# Allegro board board6DFfils7Fini.brd
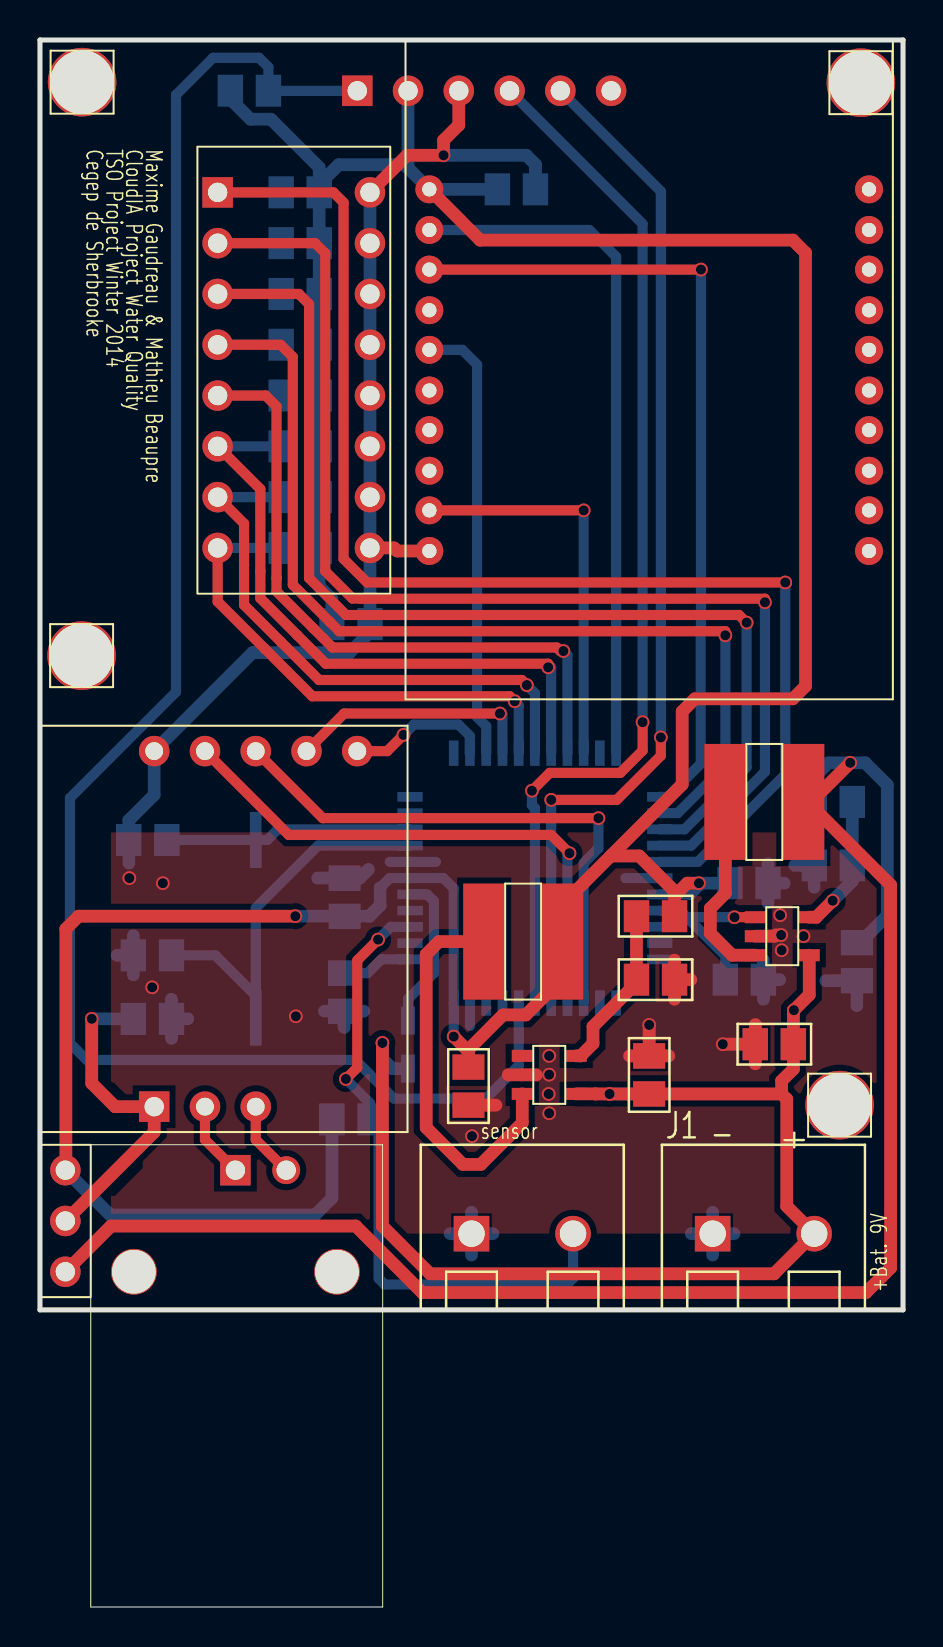
[diagram p0: board, top side]
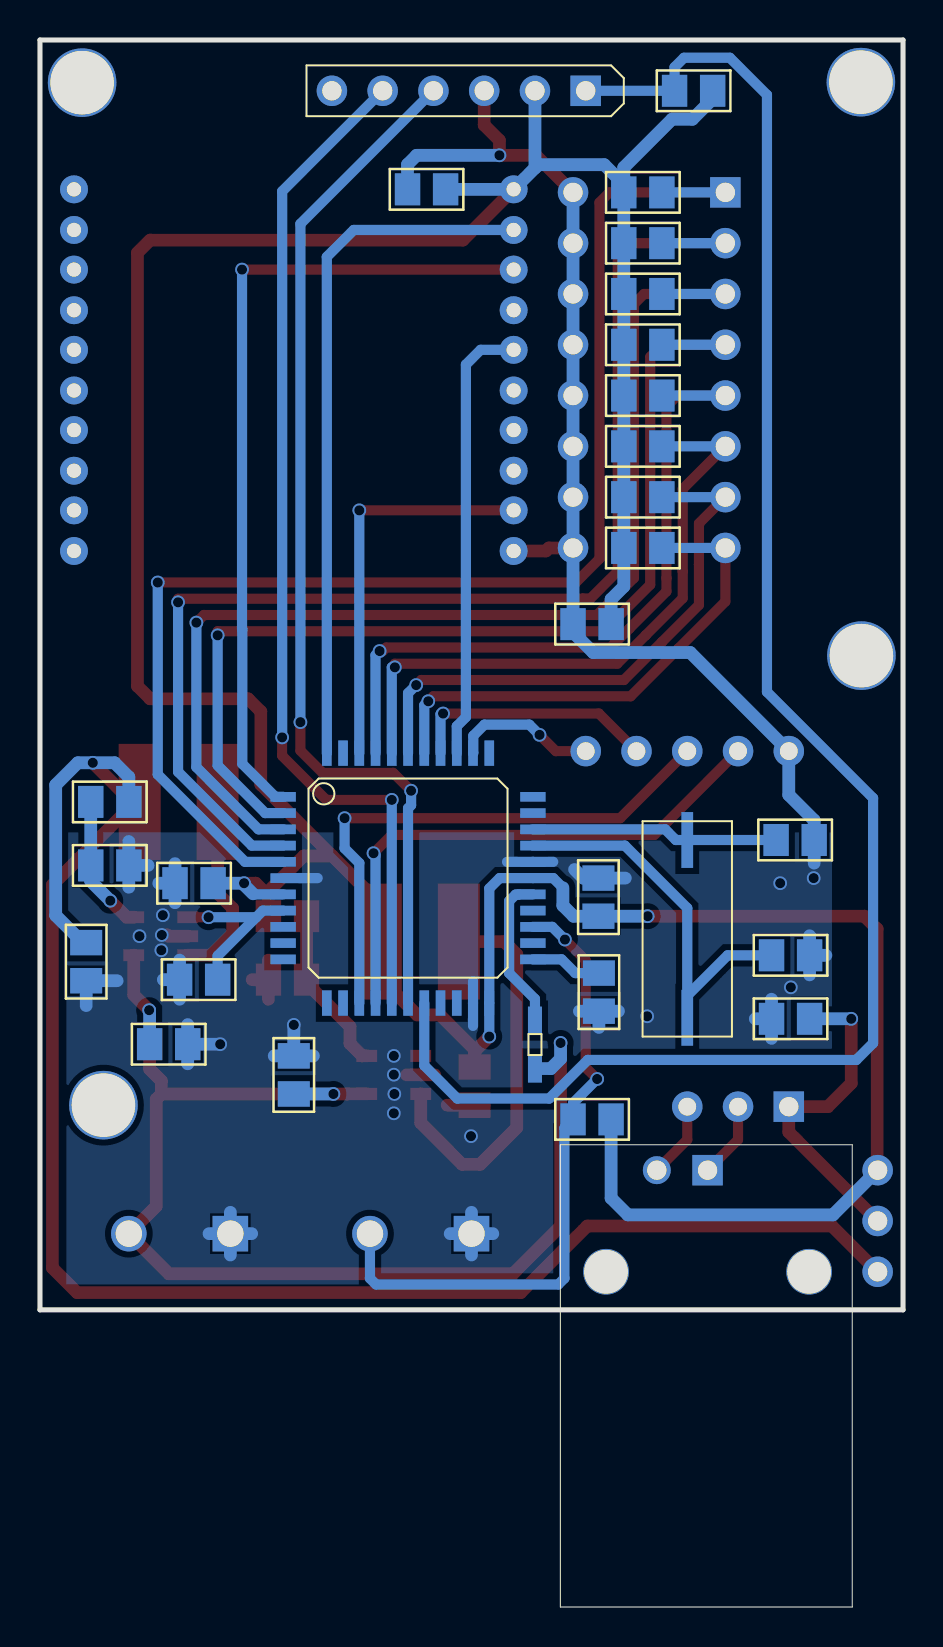
[diagram p1: board, bottom side, seen from below]

Outline 43.18 x 78.36 mm; copper layers: TOP, BOTTOM. Coordinates in mm from the lower left corner of the outline.
Outline path: 0,78.36 0,14.86 43.18,14.86 43.18,78.36 0,78.36

## Design rules (mm)
nets with their own width: min track width 0.508; nets CAPTEURRX CAPTEURTX CELL7 CELL8 ENABLE POWER5V N45185 N45221 N45265 N45305 N56544 N56546 N56548 N56550 N56552 N56554 N56556 N56558 N61373 N61405 N78069 N78169 N81598 N94966 XBEEDIN XBEEDOUT XBEERESET XBEESLEEP
nets with their own width: min track width 0.635; nets 3.3V 5V 6A9V(PILE) GND N61433 N82912 N83047 N88127 N88155

## Placement (name value [footprint] x y rotation side)
3.3V  Vz 6V  [DIODESOD323]  18.41 26.92 90 bottom
+BAT. 9V  HEADER 2  [CONNECTEUR_2_200]  33.65 18.67 0 top
C1  10uF  [C_0805]  35.79 28.14 0 bottom
C2  100nF  [C_0805]  35.79 28.14 0 top
C3  10uF  [C_0805]  40.87 31.32 90 bottom
C4  10uF  [C_0805]  30.48 27.56 270 top
C5  100nF  [C_0805]  30.48 27.56 270 bottom
C6  22uF  [C_0805]  21.44 25.1 90 top
C7  10uF  [C_0805]  14.61 49.15 0 bottom
C8  100uF  [C_0805]  22.89 70.89 0 bottom
C9  27pF  [C_0805]  4.67 32.59 0 bottom
C10  27pF  [C_0805]  4.44 38.35 0 bottom
C11  10uF  [C_0805]  15.21 31.7 270 bottom
C12  0.1 uF  [C_0805]  15.24 34.54 90 bottom
C13  0.1 uF  [C_0805]  34.52 36.2 0 bottom
C14  10uF  [C_0805]  4.67 29.41 0 bottom
J2  HEADER 3  [JUMPER3]  1.27 16.76 90 top
J3  Convertion Board  [CONDUCTIVITY_SENSOR]  0 23.75 90 top
J4  BNC au capteur  [CONNECTEUR_BNC]  2.54 23.11 270 top
J6  Connecteur PicKit  [SIP6]  15.88 75.82 270 bottom
J7  contact eau  [CONNECTEUR_2_200]  21.59 18.67 0 top
L1  10uH  [BOBINE10U100MH]  34.29 40.26 0 top
L2  10uH  [BOBINE10U100MH]  22.23 33.27 0 top
NOREF  -  [unnamed]  40 25.1 270 top
NOREF#2  -  [unnamed]  2.11 76.25 270 top
NOREF#3  -  [unnamed]  41.07 76.23 270 top
NOREF#4  -  [unnamed]  2.08 47.57 270 top
R1  105K  [R_0805]  40.64 40.26 180 bottom
R2  ?  [R_0805]  36.2 31.37 180 bottom
R3  20K  [R_0805]  38.73 37.08 0 bottom
R4  61.9K  [R_0805]  29.84 34.54 0 top
R5  20K  [R_0805]  31.75 31.37 180 top
R6  4.7K  [R_0805]  9.53 75.82 0 bottom
R7  10K  [R_0805]  16.51 24.38 180 bottom
R8  10K  [R_0805]  12.07 70.74 0 bottom
R9  10K  [R_0805]  12.07 68.2 0 bottom
R10  10K  [R_0805]  12.07 65.66 0 bottom
R11  10K  [R_0805]  12.07 63.12 0 bottom
R12  10K  [R_0805]  12.07 60.58 0 bottom
R13  10K  [R_0805]  12.07 58.04 0 bottom
R14  10K  [R_0805]  12.07 55.5 0 bottom
R15  10K  [R_0805]  12.07 52.96 0 bottom
SW1  SW DIP-8  [DIPSWITCH]  8.89 70.74 0 top
U1  LM104/TO  [TPS560200]  35.79 34.49 0 top
U2  LM104/TO  [TPS560200]  24.13 27.56 0 top
U3  PIC18F47J13  [PQFP44]  24.77 36.45 180 bottom
U4  Xbee  [XBEE]  30.48 61.85 0 top
Y1  4Mhz CRYSTAL  [CRYSTAL_SMD]  10.79 33.91 270 bottom

## Library data of the parts
3.3V = DIODE ZENER
+BAT. 9V = HEADER 2_1
C1-C6 C14 = C
C7-C11 = CAPACITOR NON-POL
C12 C13 = CAP NP
J2 = HEADER 3
J3 = HEADER 3X2_3
J4 = BNC
J6 = HEADER 6_0
J7 = HEADER 2
L1 L2 = INDUCTOR
R1-R5 R7-R15 = R
R6 = RESISTOR
SW1 = SW DIP-8: User Part Number: ***
U1 U2 = LM104/TO_3
U3 = PIC16C67_2
U4 = HEADER 11X2_1
Y1 = CRYSTAL

## Footprints (pads in the part's own frame, mm; a bottom-side part is the same pattern mirrored in y, then rotated)
BOBINE10U100MH
  rect 2.1x5.8 smd: 1(0,0) 2(3.9,0)
C_0805
  rect 1.27x1.6 smd: 1(0,0) 2(1.905,0)
CONDUCTIVITY_SENSOR
  rect 1.524x1.524 hole 0.965: 1(1.27,-5.715)
  round 1.524 hole 0.889: 2(1.27,-8.255) 3(1.27,-10.795) 4(19.05,-5.715) 5(19.05,-8.255) 6(19.05,-10.795) 7(19.05,-13.335) 8(19.05,-15.875)
CONNECTEUR_2_200
  rect 1.778x1.778 hole 1.321: 1(0,0)
  round 1.778 hole 1.321: 2(5.08,0)
CONNECTEUR_BNC
  round 2.286 hole 2.184: (6.35,12.319) (6.35,2.159)
  rect 1.524x1.524 hole 0.965: 1(1.27,7.239)
  round 1.397 hole 0.965: 2(1.27,9.779)
CRYSTAL_SMD
  rect 2.794x0.584 smd: 1(-4.445,0) 2(4.445,0)
DIODESOD323
  rect 1.4x0.7 smd: 1(0,0) 2(2.4,0)
DIPSWITCH
  rect 1.524x1.524 hole 0.965: 1(0,0)
  round 1.524 hole 0.965: 2(0,-2.54) 3(0,-5.08) 4(0,-7.62) 5(0,-10.16) 6(0,-12.7) 7(0,-15.24) 8(0,-17.78) 9(7.62,-17.78) 10(7.62,-15.24) 11(7.62,-12.7) 12(7.62,-10.16) 13(7.62,-7.62) 14(7.62,-5.08) 15(7.62,-2.54) 16(7.62,0)
JUMPER3
  round 1.524 hole 0.965: 1(0,0) 2(2.54,0) 3(5.08,0)
PQFP44
  rect 1.27x0.483 smd: 1(-6.248,4.064) 2(-6.248,3.251) 3(-6.248,2.438) 4(-6.248,1.626) 5(-6.248,0.813) 6(-6.248,0) 7(-6.248,-0.813) 8(-6.248,-1.626) 9(-6.248,-2.438) 10(-6.248,-3.251) 11(-6.248,-4.064) 23(6.248,-4.064) 24(6.248,-3.251) 25(6.248,-2.438) 26(6.248,-1.626) 27(6.248,-0.813) 28(6.248,0) 29(6.248,0.813) 30(6.248,1.626) 31(6.248,2.438) 32(6.248,3.251) 33(6.248,4.064)
  rect 0.483x1.27 smd: 12(-4.064,-6.248) 13(-3.251,-6.248) 14(-2.438,-6.248) 15(-1.626,-6.248) 16(-0.813,-6.248) 17(0,-6.248) 18(0.813,-6.248) 19(1.626,-6.248) 20(2.438,-6.248) 21(3.251,-6.248) 22(4.064,-6.248) 34(4.064,6.248) 35(3.251,6.248) 36(2.438,6.248) 37(1.626,6.248) 38(0.813,6.248) 39(0,6.248) 40(-0.813,6.248) 41(-1.626,6.248) 42(-2.438,6.248) 43(-3.251,6.248) 44(-4.064,6.248)
R_0805
  rect 1.27x1.6 smd: 1(0,0) 2(1.905,0)
SIP6
  rect 1.524x1.524 hole 0.965: 1(0,0)
  round 1.524 hole 0.965: 2(0,-2.54) 3(0,-5.08) 4(0,-7.62) 5(0,-10.16) 6(0,-12.7)
TPS560200
  rect 1.05x0.6 smd: 1(0,0) 2(0,-0.95) 3(0,-1.9) 4(2.7,-1.9) 5(2.7,0)
unnamed
  round 3.429 hole 3.175: 1(0,0)
XBEE
  round 1.397 hole 0.711: 1(-10.998,9.042) 2(-10.998,7.01) 3(-10.998,5.029) 4(-10.998,2.997) 5(-10.998,1.016) 6(-10.998,-1.016) 7(-10.998,-2.997) 8(-10.998,-5.029) 9(-10.998,-7.01) 10(-10.998,-9.042) 11(10.998,-9.042) 12(10.998,-7.01) 13(10.998,-5.029) 14(10.998,-2.997) 15(10.998,-1.016) 16(10.998,1.016) 17(10.998,2.997) 18(10.998,5.029) 19(10.998,7.01) 20(10.998,9.042)

## Nets
3.3V: C6.2 C7.1 C8.1 C12.1 C13.1 J2.3 J6.2 L2.2 R4.2 R6.1 R7.2 R8.2 R9.2 R10.2 R11.2 R12.2 R13.2 R14.2 R15.2 U3.7(VDD1) U3.22(RA3) U3.28(VDD2) U4.1
5V: C3.2 J2.1 L1.2 R1.2
GND: +BAT. 9V.1 C1.1 C2.1 C3.1 C4.1 C5.1 C6.1 C7.2 C8.2 C9.1 C10.1 C11.2 C12.2 C13.2 C14.2 J3.4(GND) J6.3 J7.1 R2.1 R3.1 R5.1 SW1.9(B8) SW1.10(B7) SW1.11(B6) SW1.12(B5) SW1.13(B4) SW1.14(B3) SW1.15(B2) SW1.16(B1) U1.2(GND) U2.2(GND) U3.6(VSS1) U3.21(RA2) U3.29(VSS2) U4.10
6A9V(PILE): 3.3V.1(CATHODE) +BAT. 9V.2 C1.2 C2.2 C4.2 C5.2 U1.4(VIN) U2.4(VIN)
CAPTEURRX: J3.6 U3.14(RB4)
CAPTEURTX: J3.5 U3.15(RB5)
CELL7: J3.8 U3.35(RC1)
CELL8: J3.7 U3.37(RC3/SCL1)
ENABLE POWER5V: R2.2 U1.1(EN) U3.8(RB0)
XBEEDIN: U3.1(RC7) U4.3
XBEEDOUT: U3.44(RC6) U4.2
XBEERESET: U3.36(RC2) U4.5
XBEESLEEP: U3.42(RC4/SDA1/SDI) U4.9
N45185: C11.1 U3.23(VDDCORE)
N45221: J6.5 U3.16(RB6)
N45265: J6.4 U3.17(RB7)
N45305: J6.1 R6.2 U3.18(M\C\L\R\)
N56544: R8.1 SW1.1(A1) U3.5(RD7)
N56546: R9.1 SW1.2(A2) U3.4(RD6)
N56548: R10.1 SW1.3(A3) U3.3(RD5)
N56550: R11.1 SW1.4(A4) U3.2(RD4)
N56552: R12.1 SW1.5(A5) U3.41(RD3)
N56554: R13.1 SW1.6(A6) U3.40(RD2)
N56556: R14.1 SW1.7(A7) U3.39(RD1/SDA2)
N56558: R15.1 SW1.8(A8) U3.38(RD0/SCL2)
N61373: J3.2 J4.1(CENTER)
N61405: J3.3 J4.2(SHIELD)
N61433: C14.1 J2.2 J3.1
N78069: C9.2 U3.30(OSC1/RA7) Y1.2
N78169: C10.2 U3.31(OSC2/RA6) Y1.1
N81598: 3.3V.2(ANODE) U3.27(RE2)
N82912: R4.1 R5.2 U2.5(VSENSE)
N83047: L2.1 U2.3(PH)
N88127: R1.1 R3.2 U1.5(VSENSE)
N88155: L1.1 U1.3(PH)
N94966: J7.2 R7.1 U3.25(RE0)

Pads without a net: J6 6; NOREF 1; NOREF#2 1; NOREF#3 1; NOREF#4 1; U2 1; U3 9 10 11 12 13 19 20 24 26 32 33 34 43; U4 4 6 7 8 11 12 13 14 15 16 17 18 19 20

## Via types
v1: diameter 0.686, hole 0.508, TOP to BOTTOM, 46 vias

## Routing (per net, layer and track width the routed paths; a pad name or vN(x,y) marks a point on that pad's centre or on a via; arc(x,y) is an arc through that point)
3.3V: length 185.1
  TOP w0.635: 21.36,27.86 21.44,27.79 C6.2 ; 21.36,27.86 21.42,27.86 23.17,29.61 24.31,29.61 26.12,31.42 L2.2 26.12,35.12 28.56,37.56 ; 21.36,27.86 v1(20.7,28.52) ; 28.56,37.56 29.98,37.56 31.75,35.79 31.75,35.56 ; 28.56,37.56 32.13,41.13 32.13,44.78 32.77,45.42 37.67,45.42 38.3,46.05 38.3,67.72 37.67,68.35 22.02,68.35 U4.1 ; v1(12.78,34.54) 1.93,34.54 1.3,33.91 1.3,21.87 J2.3 ; v1(32.97,36.2) 32.38,36.2 31.75,35.56 ; 31.75,35.56 R4.2
  BOTTOM w0.508: 32.52,35.67 32.49,35.64 U3.7 ; v1(20.7,28.52) U3.22 20.7,35.93 20.18,36.45 U3.28 17.5,36.45 17.02,35.97
  BOTTOM w0.635: R6.1 9.53,75.41 10.54,74.4 11.56,74.4 13.97,71.98 13.97,71.15 ; J2.3 3.51,19.61 13.77,19.61 14.61,20.45 R7.2 ; C7.1 14.61,50.39 13.97,51.03 R15.2 R14.2 R13.2 R12.2 R11.2 R10.2 R9.2 R8.2 13.97,71.15 ; 32.52,35.67 32.97,36.11 v1(32.97,36.2) C13.1 ; 13.97,71.15 14.95,72.12 18.25,72.12 18.41,71.96 ; v1(12.78,34.54) C12.1 16.48,34.54 17.02,35.08 17.02,35.97 ; 18.41,71.96 U4.1 C8.1 ; 18.41,71.96 J6.2
5V: length 86.6
  TOP w0.635: 38.4,40.26 L1.2 ; 38.4,40.26 38.58,40.26 v1(40.54,42.21) ; 38.4,40.26 42.56,36.11 42.56,16.96 41.33,15.72 19.13,15.72 15.8,19.05 3.56,19.05 J2.1
  BOTTOM w0.635: C3.2 41.03,33.22 42.39,34.58 42.39,41.11 41.29,42.21 v1(40.54,42.21) 39.45,42.21 38.73,41.5 R1.2
GND: length 117.4
  TOP w0.635: v1(34.16,28.14) C2.1 ; C2.1 35.79,29.12 ; C2.1 35.79,27.16 ; J6.3 20.96,74.1 20.19,73.34 v1(20.19,72.59) 18.36,72.59 SW1.16 ; U1.2 36.75,33.54 36.81,33.6 v1(37.08,33.6) ; 24.83,26.61 U2.2 23.43,26.61 ; v1(30.48,29.11) C4.1 ; C4.1 31.46,27.56 ; C4.1 29.5,27.56 ; SW1.9 17.72,52.96 17.87,52.81 U4.10 ; 31.75,30.39 R5.1 ; R5.1 32.56,31.37 ; R5.1 31.75,32.35 ; 20.96,25.1 C6.1 22.81,25.1
  BOTTOM w0.508: 19.81,37.26 U3.29 17.5,37.26 ; 21.51,29.06 U3.21 21.51,31.29 ; U3.6 29.29,36.45
  BOTTOM w0.635: v1(20.19,72.59) 24.33,72.59 24.79,72.14 C8.2 ; 21.59,17.6 J7.1 ; J7.1 20.52,18.67 ; J7.1 21.59,19.74 ; J7.1 22.66,18.67 ; v1(30.48,29.11) C4.1 ; C4.1 29.5,27.56 ; C4.1 31.46,27.56 ; +BAT. 9V.1 34.72,18.67 ; +BAT. 9V.1 32.59,18.67 ; +BAT. 9V.1 33.65,19.74 ; +BAT. 9V.1 33.65,17.6 ; C11.2 16.19,29.79 ; C11.2 14.24,29.79 ; C11.2 15.21,28.98 ; v1(34.16,28.14) C2.1 ; C2.1 35.79,27.16 ; C2.1 35.79,29.12 ; R3.1 38.73,38.28 ; R3.1 37.77,37.08 ; R3.1 38.73,35.99 ; C9.1 4.67,33.57 ; C9.1 3.86,32.59 ; C9.1 4.67,31.61 ; R2.1 37.01,31.37 ; R2.1 36.2,30.39 ; R2.1 36.2,32.35 ; 4.44,37.2 C10.1 4.44,39.34 5.71,40.61 J3.4 10.64,47.73 15.5,47.73 16.51,48.74 C7.2 SW1.9 SW1.10 SW1.11 SW1.12 SW1.13 SW1.14 SW1.15 SW1.16 ; C13.2 36.42,37.17 ; C13.2 36.42,35.22 ; C13.2 37.24,36.2 ; 40.87,30.07 C3.1 39.32,31.32 ; 13.89,36.45 C12.2 16,36.45 16.43,36.88 ; C14.2 7.39,29.41 ; C14.2 6.58,28.43 ; C14.2 6.58,30.39
  vias: v1(4.47,36.45) v1(5.61,30.99) v1(6.15,36.2) v1(12.8,29.54) v1(21.62,23.55) v1(25.48,27.56) v1(25.48,26.62) v1(25.45,25.65) v1(25.48,24.69) v1(37.03,34.59) v1(37.11,32.84) v1(38.2,33.55)
6A9V(PILE): length 64
  TOP w0.635: 37.11,25.65 37.11,26.31 37.69,26.9 C2.2 37.69,29.82 v1(37.72,29.84) 38.49,30.61 U1.4 ; 37.11,25.65 C4.2 v1(28.5,25.65) 27.8,25.65 27.8,25.66 U2.4 ; 37.11,25.65 37.36,25.4 37.36,20.04 +BAT. 9V.2 36.73,16.66 19.52,16.66 17.13,19.05 v1(17.13,28.21)
  BOTTOM w0.635: C2.2 37.69,29.82 v1(37.72,29.84) ; C4.2 v1(28.5,25.65) ; v1(17.13,28.21) 17.13,27.41 17.62,26.92 3.3V.1
CAPTEURRX: length 28.1
  TOP w0.508: J3.6 14.15,39.45 v1(27.94,39.45)
  BOTTOM w0.508: U3.14 27.2,37.2 27.94,37.94 v1(27.94,39.45)
CAPTEURTX: length 27.9
  TOP w0.508: J3.5 12.45,38.61 25.58,38.61 v1(26.49,37.69)
  BOTTOM w0.508: U3.15 26.39,37.59 v1(26.49,37.69)
CELL7: length 7.3
  TOP w0.508: J3.8 17.37,42.8 v1(18.19,43.61)
  BOTTOM w0.508: v1(18.19,43.61) 18.7,44.12 20.94,44.12 21.5,43.56 21.5,42.71 U3.35
CELL8: length 12.5
  TOP w0.508: v1(23.01,44.68) 15.21,44.68 J3.7
  BOTTOM w0.508: v1(23.01,44.68) 23.11,44.68 23.14,44.65 U3.37
ENABLE POWER5V: length 8.8
  TOP w0.508: U1.1 v1(34.75,34.49)
  BOTTOM w0.508: v1(34.75,34.49) 32.36,34.49 ; 32.36,34.49 32.03,34.82 U3.8 ; 32.36,34.49 34.29,32.56 R2.2
XBEEDIN: length 41
  TOP w0.508: v1(33.07,66.88) U4.3
  BOTTOM w0.508: U3.1 31.41,40.51 33.06,42.16 33.06,48.89 33.07,48.9 v1(33.07,66.88)
XBEEDOUT: length 34.7
  BOTTOM w0.508: U3.44 28.83,67.51 27.48,68.86 U4.2
XBEERESET: length 22.3
  BOTTOM w0.508: U3.36 22.33,44.04 21.87,44.5 21.87,62.13 21.13,62.86 U4.5
XBEESLEEP: length 19.9
  TOP w0.508: U4.9 v1(27.2,54.84)
  BOTTOM w0.508: v1(27.2,54.84) U3.42
N45185: length 3.6
  BOTTOM w0.508: C11.1 16.4,31.7 17.08,32.39 U3.23
N45221: length 51.9
  TOP w0.508: v1(31.06,43.48) 31.06,42.57 28.85,40.36 v1(25.58,40.36)
  BOTTOM w0.508: J6.5 31.06,70.79 v1(31.06,43.48) ; U3.16 v1(25.58,40.36)
N45265: length 52.8
  TOP w0.508: v1(30.15,44.25) 30.15,42.82 29.04,41.71 25.51,41.71 v1(24.61,40.82)
  BOTTOM w0.508: U3.17 24.77,39.94 24.61,40.09 v1(24.61,40.82) ; v1(30.15,44.25) 30.15,69.16 J6.4
N45305: length 88.2
  BOTTOM w0.508: U3.18 23.95,27.08 22.3,25.43 17.7,25.43 15.77,27.36 2.34,27.36 1.5,28.19 1.5,40.45 6.81,45.76 6.81,75.62 8.66,77.47 10.96,77.47 11.43,77 R6.2 J6.1
N56544: length 67.8
  TOP w0.508: SW1.1 14.68,70.74 15.19,70.23 15.19,52.41 16.37,51.23 v1(37.29,51.23)
  BOTTOM w0.508: U3.5 32.92,37.26 37.29,41.63 v1(37.29,51.23) ; SW1.1 R8.1
N56546: length 62.7
  TOP w0.508: SW1.2 13.77,68.2 14.27,67.69 14.27,51.79 15.63,50.43 16.02,50.43 16.03,50.42 36.27,50.42 v1(36.27,50.24)
  BOTTOM w0.508: v1(36.27,50.24) 36.27,41.76 32.58,38.07 U3.4 ; R9.1 SW1.2
N56548: length 57.3
  TOP w0.508: SW1.3 12.95,65.66 13.46,65.15 13.46,51.45 15.31,49.61 34.98,49.61 v1(35.36,49.23)
  BOTTOM w0.508: v1(35.36,49.23) 35.36,42 32.24,38.89 U3.3 ; R10.1 SW1.3
N56550: length 52.2
  TOP w0.508: v1(34.29,48.59) 34.29,48.79 14.97,48.79 14.5,49.27 12.65,51.12 12.65,62.51 12.04,63.12 SW1.4
  BOTTOM w0.508: U3.2 31.91,39.7 34.29,42.08 v1(34.29,48.59) ; R11.1 SW1.4
N56552: length 36.4
  TOP w0.508: v1(26.19,47.8) 26.04,47.8 25.86,47.98 14.64,47.98 13.68,48.93 11.84,50.78 11.84,51.45 11.84,60.04 11.29,60.58 SW1.5
  BOTTOM w0.508: U3.41 26.39,47.6 v1(26.19,47.8) ; R12.1 SW1.5
N56554: length 32
  TOP w0.508: v1(25.43,46.99) 25.43,47.17 14.3,47.17 12.87,48.6 11.02,50.44 11.02,51.79 11.02,55.91 SW1.6
  BOTTOM w0.508: R13.1 SW1.6 ; U3.40 25.58,46.99 v1(25.43,46.99)
N56556: length 28.5
  TOP w0.508: SW1.7 10.21,54.18 10.21,52.13 10.21,50.11 12.06,48.26 13.96,46.36 24.1,46.36 v1(24.36,46.1)
  BOTTOM w0.508: R14.1 SW1.7 ; U3.39 24.77,45.69 v1(24.36,46.1)
N56558: length 25.5
  TOP w0.508: v1(23.75,45.29) 23.5,45.54 13.63,45.54 11.25,47.92 8.89,50.28 SW1.8
  BOTTOM w0.508: U3.38 23.95,45.09 v1(23.75,45.29) ; SW1.8 R15.1
N61373: length 3.8
  TOP w0.508: J3.2 8.26,23.37 J4.1
N61405: length 3.8
  TOP w0.508: J3.3 10.79,23.37 J4.2
N61433: length 16.5
  TOP w0.635: v1(2.59,29.41) 2.59,26.19 3.76,25.02 J3.1 5.71,23.75 J2.2
  BOTTOM w0.635: C14.1 v1(2.59,29.41)
N78069: length 19.6
  BOTTOM w0.508: 10.79,30.57 10.79,34.95 13.92,38.07 U3.30 ; 10.79,30.57 8.78,32.59 C9.2 ; 10.79,30.57 Y1.2
N78169: length 12.4
  BOTTOM w0.508: C10.2 Y1.1 11.37,38.35 11.9,38.89 U3.31
N81598: length 7.8
  BOTTOM w0.508: 3.3V.2 18.41,30.41 19.71,31.7 19.71,35.3 19.38,35.62 19.24,35.62 19.23,35.64 U3.27
N82912: length 8.4
  TOP w0.635: U2.5 27.06,27.56 27.67,28.17 27.67,29.03 29.84,31.2 R5.2 R4.1
N83047: length 19.7
  TOP w0.635: L2.1 19.96,33.27 19.32,32.64 19.32,23.97 21.16,22.13 22.06,22.13 24.13,24.21 U2.3
N88127: length 6.9
  TOP w0.635: v1(39.66,35.32) 38.84,34.49 U1.5
  BOTTOM w0.635: R1.1 R3.2 40.64,36.3 v1(39.66,35.32)
N88155: length 9.6
  TOP w0.635: U1.3 34.63,32.59 33.54,33.68 33.54,34.94 34.29,35.69 L1.1
N94966: length 32.4
  TOP w0.508: v1(15.3,26.4) 15.88,26.97 15.88,32.33 v1(16.92,33.38)
  BOTTOM w0.508: U3.25 17.55,34.01 v1(16.92,33.38) ; v1(15.3,26.4) 16.51,25.2 R7.1 16.94,23.95 16.94,16.43 17.25,16.13 26.37,16.13 26.67,16.43 J7.2

## Copper pours and planes (outline as drawn; the poured copper is in the pictures)
GND on TOP: 18.39,18.67 17.76,19.3 17.76,28.03 17.76,28.03 17.42,28.79 16.62,28.6 16.5,28.56 16.43,28.66 16.43,32.1 17.08,32.75 17.09,32.75 17.37,33.83 16.29,33.55 16.29,33.54 15.32,32.57 15.32,27.21 15.14,27.03 15.13,27.03 14.85,25.94 15.93,26.23 15.93,26.24 16.34,26.65 16.45,26.67 16.51,26.57 16.51,19.47 16.45,19.37 16.34,19.39 16.06,19.67 3.56,19.67 3.56,20.56 3.75,20.56 5.14,21.95 5.14,22.3 6.34,23.49 6.34,23.95 6.78,23.95 6.78,26.09 4.65,26.09 4.65,25.64 4.28,25.64 3.73,26.2 3.7,26.22 3.66,26.23 3.59,26.26 3.56,26.33 3.56,33.92 12.6,33.92 12.6,33.92 13.42,34.54 12.6,35.17 12.6,35.17 3.56,35.17 3.56,38.73 11.53,38.73 12.21,38.05 25.35,38.05 25.86,37.53 25.87,37.52 26.95,37.24 26.67,38.32 26.66,38.32 26.41,38.56 26.39,38.67 26.49,38.73 27.71,38.73 27.71,37.67 27.71,37.59 26.6,36.48 24.77,36.48 24.77,30.95 24.05,30.23 23.58,30.23 23.58,36.48 20.87,36.48 20.87,33.9 19.7,33.9 18.7,32.9 18.7,23.71 20.9,21.51 22.31,21.51 24.75,23.95 24.75,25.05 24.96,25.05 24.96,26.26 24.78,26.26 24.78,26.95 24.96,26.95 24.96,28.16 23.3,28.16 23.3,26.95 23.48,26.95 23.48,26.26 23.3,26.26 23.3,25.05 23.51,25.05 23.51,24.46 21.8,22.76 21.42,22.76 19.95,24.23 19.95,32.38 20.22,32.65 20.87,32.65 20.87,30.07 22.5,30.07 22.6,30.01 22.58,29.9 21.39,28.71 21.27,28.84 21.27,28.84 20.26,29 20.33,27.99 20.33,26.06 22.54,26.06 22.54,27.94 22.5,27.94 22.46,27.97 22.47,28.03 23.43,28.99 24.57,28.99 25.65,30.07 27.48,30.07 27.48,35.6 28.81,36.93 29.72,36.93 30.84,35.82 30.86,35.71 30.76,35.65 28.9,35.65 28.9,33.44 29.22,33.44 29.22,32.47 28.9,32.47 28.9,31.14 27.05,29.29 27.05,28.43 26.8,28.18 26.73,28.17 26.68,28.16 26,28.16 26,26.95 26.68,26.95 26.76,26.94 26.83,26.94 27.31,26.94 27.33,26.95 27.66,26.95 27.66,27.28 28.29,27.92 28.29,28.77 29.79,30.26 30.79,30.26 30.79,32.47 30.47,32.47 30.47,33.44 32.69,33.44 32.69,35.57 32.79,35.57 32.91,35.55 33.02,35.55 33.12,35.49 33.1,35.38 32.92,35.2 32.92,33.43 34.37,31.97 35.79,31.97 35.86,31.97 35.94,31.99 36.62,31.99 36.62,33.2 36.44,33.2 36.44,33.89 36.62,33.89 36.62,35.1 34.98,35.1 34.91,35.12 34.85,35.13 34.77,35.2 34.79,35.31 34.91,35.43 34.91,37.05 35.65,37.05 35.65,38.73 36.83,38.73 36.83,37.05 39.55,37.05 39.55,37.99 39.61,38.09 39.72,38.06 41.86,35.92 41.86,26.29 41.79,26.19 41.67,26.23 39.74,27.1 38.1,25.75 38.02,25.69 37.93,25.71 37.73,25.91 37.73,26.05 38.32,26.64 38.32,27.04 38.63,27.04 38.63,29.25 38.32,29.25 38.32,29.56 39.11,30.36 39.11,31.99 39.32,31.99 39.32,33.2 38.64,33.2 38.63,33.2 38.49,33.22 38.35,33.2 38.34,33.2 37.66,33.2 37.66,31.99 37.87,31.99 37.87,30.87 37.41,30.41 37.4,30.41 37.26,30.3 37.15,30.16 37.15,30.16 37.07,30.08 37.07,29.25 36.75,29.25 36.75,27.03 36.81,26.95 36.78,26.86 36.48,26.57 36.48,26.28 31.59,26.28 31.59,26.59 29.37,26.59 29.37,26.28 28.68,26.28 28.67,26.28 28.5,26.3 28.33,26.28 28.32,26.28 28.06,26.28 28.06,26.28 26.83,26.28 26.76,26.28 26.68,26.26 26,26.26 26,25.05 26.68,25.05 26.76,25.04 26.83,25.04 27.54,25.04 27.55,25.03 28.32,25.03 28.33,25.03 28.5,25.01 28.67,25.03 28.68,25.03 29.37,25.03 29.37,24.71 31.59,24.71 31.59,25.03 36.74,25.03 36.74,19.78 37.57,18.95 37.57,18.92 37.55,18.82 37.54,18.72 37.54,18.67 34.67,18.67 34.67,19.69 32.64,19.69 32.64,18.67 27.87,18.67 27.86,18.72 26.67,19.86 25.48,18.72 25.47,18.67 22.61,18.67 22.61,19.69 20.57,19.69 20.57,18.67
GND on BOTTOM: 34.42,33.93 35.28,34.12 35.16,35 35.19,35.06 35.26,35.09 35.46,35.09 35.46,37.3 33.99,37.3 33.9,37.36 33.92,37.47 34.69,38.24 35.18,38.73 40.02,38.73 40.02,38.19 39.7,38.19 39.7,36.24 39.67,36.21 39.56,36.19 39.5,36.28 39.5,38.01 37.97,38.01 37.97,36.16 39.37,36.16 39.47,36.09 39.45,35.98 39.35,35.89 39.2,34.86 40.23,35.01 41.2,35.98 41.58,35.98 41.58,38.19 41.26,38.19 41.26,38.73 41.77,38.73 41.77,34.84 41.09,34.16 39.76,34.16 39.76,32.28 41.86,32.28 41.86,32.08 39.94,32.08 39.94,30.56 41.86,30.56 41.86,26.2 41.83,26.13 41.76,26.1 37.99,25.1 41.76,24.09 41.83,24.06 41.86,23.99 41.86,16.13 27.23,16.13 27.23,17.61 26.67,19.86 26.11,17.61 26.11,16.69 17.5,16.69 17.5,24.18 17.45,24.23 17.45,24.87 22.53,24.87 24.51,26.84 24.51,29.26 29.38,29.26 29.38,31.14 27.76,31.14 27.76,36.97 28.5,37.71 28.5,38.73 30.07,38.73 30.07,36.72 30.25,36.72 30.25,36.18 30.07,36.18 30.07,31.84 31.95,31.84 31.95,33.86 32.02,33.96 32.13,33.93 33.41,32.65 33.44,32.54 33.35,32.47 33.35,30.26 35.23,30.26 35.23,32.47 34.85,32.47 34.85,32.79 33.88,33.76 33.86,33.87 33.95,33.93
GND on BOTTOM: 19.07,28.32 19.07,30.27 19.97,31.17 20.08,31.19 20.14,31.1 20.14,28.85 20.7,27.88 21.26,28.85 21.26,29.44 21.78,29.44 21.78,29.26 23.39,29.26 23.39,27.31 22.07,25.98 19.07,25.98 19.07,27.93 17.76,27.93 17.76,28.03 17.78,28.12 17.78,28.22 17.81,28.29 17.88,28.32
GND on BOTTOM: 16.32,33.12 16.56,32.83 16.61,32.76 16.58,32.67 16.49,32.59 16.39,32.56 16.32,32.64 14.11,32.64 14.11,30.76 16.32,30.76 16.32,31.14 16.63,31.14 17.31,31.83 18.52,31.83 18.57,31.83 18.64,31.84 18.81,31.84 18.91,31.78 18.88,31.67 17.86,30.64 17.86,30.33 17.76,30.33 17.76,28.74 17.7,28.65 17.59,28.67 16.8,28.77 16.51,28.03 16.51,28.03 16.51,27.66 16.45,27.56 16.34,27.58 16.01,27.92 11.39,27.92 11.39,31.17 11.35,31.17 11.35,34.72 14.15,37.52 17.75,37.52 17.75,37.01 17.27,37.01 16.82,36.56 16.81,36.55 16.51,36.32 16.4,35.97 16.4,35.48 14.13,35.48 14.13,35.17 12.96,35.17 12.95,35.17 12.13,34.54 12.95,33.92 12.96,33.92 14.13,33.92 14.13,33.6 16.18,33.6 16.26,33.57 16.28,33.49
GND on BOTTOM: 3.56,27.86 3.56,28.84 3.78,28.84 3.78,28.36 5.56,28.36 5.56,30.47 3.78,30.47 3.78,29.99 3.56,29.99 3.56,38.73 3.68,38.73 3.68,37.43 5.21,37.43 5.21,38.73 5.46,38.73 5.46,37.3 7.24,37.3 7.24,37.85 10.25,37.85 10.25,36.7 11.34,36.7 11.34,37.85 11.58,37.85 12.11,38.38 13.26,38.38 13.35,38.32 13.33,38.21 10.29,35.16 10.29,32.04 10.22,31.95 10.11,31.97 8.99,33.1 7.47,33.1 7.47,33.64 5.69,33.64 5.69,31.53 7.47,31.53 7.47,32.08 8.57,32.08 10.25,30.4 10.25,27.86
GND on BOTTOM: 21.26,30.96 21.26,36.16 20.41,37.01 19.28,37.01 19.28,37.53 19.46,37.53 19.46,38.73 24.21,38.73 24.21,31.14 21.78,31.14 21.78,30.96

## Text on the board
Ref Des/Silkscreen Top: sensor | +Bat. 9V | Cegep de Sherbrooke | TSO Project Winter 2014 | CloudIA Project Water Quality | Maxime Gaudreau & Mathieu Beaupre | J1 | - | +
NCLEGEND-1-2: FIGURE | SIZE | 20.0 | 28.0 | 35.0 | 38.0 | 52.0 | 86.0 | 125.0 | DRILL CHART: TOP to BOTTOM | ALL UNITS ARE IN MILS | PLATED | QTY | 46 | 20 | 7 | 1 | 27 | 2 | 4
